# EAGLE board april1 board (EAGLE 7.5.0)
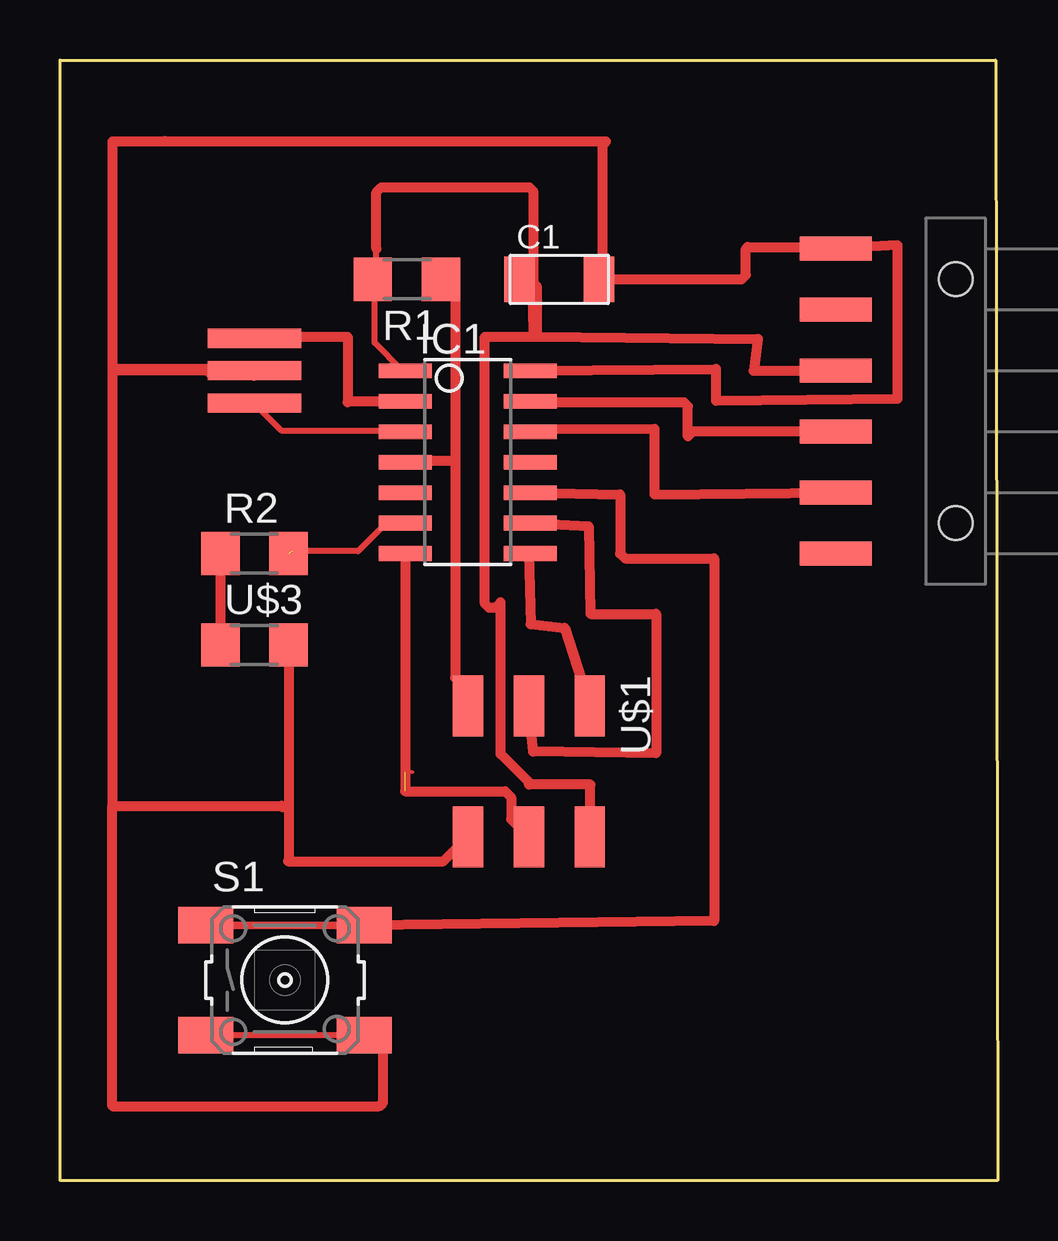
[diagram p0: board, top side]

Size 39.07 x 46.71 mm. Coordinates in mm from the lower left corner, seen from the top.
Outline: 0,46.71 38.99,46.71 39.07,0 0,0 0,46.71
Copper layers (1*16): Top 0.035mm / dielectric 1.5mm / Bottom 0.035mm
Design rules "default": minimum track width 10mil, minimum drill 24mil, track to track 8mil, track to pad 8mil, pad to pad 8mil, via to via 8mil, smd to smd 8mil, copper to edge 40mil, drill to drill 8mil, minimum pad ring 10mil, minimum via ring 8mil, stop-mask expansion 4mil, vias tented up to drill 0mil, thermal gap 10mil

## Footprints (pad centres in the part's own frame; a part is rotated, then mirrored left to right if it is on the bottom)
C1206FAB = smd 1.27 x 1.905: 1 -1.651,0; 2 1.651,0
SOIC14 = smd 0.61 x 2.21: 1 -3.81,-2.603; 2 -2.54,-2.603; 3 -1.27,-2.603; 4 0,-2.603; 5 1.27,-2.603; 6 2.54,-2.603; 7 3.81,-2.603; 8 3.81,2.603; 9 2.54,2.603; 10 1.27,2.603; 11 0,2.603; 12 -1.27,2.603; 13 -2.54,2.603; 14 -3.81,2.603
1X06-SMD = smd 1 x 3: 1 -6.35,5; 2 -3.81,5; 3 -1.27,5; 4 1.27,5; 5 3.81,5; 6 6.35,5 | hole 1.4: -5.08,0; 5.08,0
R1206 = smd 1.6 x 1.803: 1 -1.422,0; 2 1.422,0
6MM_SWITCH = smd 2.286 x 1.524: 1 -3.302,2.286; 2 3.302,2.286; 3 -3.302,-2.286; 4 3.302,-2.286
2X03SMD = smd 2.54 x 1.27: 1 -2.54,2.54; 2 2.92,2.54; 3 -2.54,0; 4 2.92,0; 5 -2.54,-2.54; 6 2.92,-2.54
EFOBM = smd 0.8 x 3.9: 1 -1.35,0; 2 0,0; 3 1.35,0
LED1206 = smd 1.6 x 1.803: 1 -1.422,0; 2 1.422,0

## Placement (x,y rotation side)
C1  1UF  [C1206FAB]  20.8,37.57 0 top
IC1  ATTINY44-SSU  [SOIC14]  16.99,29.95 270 top
JP1  [1X06-SMD]  37.31,32.49 90 top
R1  10k  [R1206]  14.45,37.57 180 top
R2  499  [R1206]  8.1,26.14 0 top
S1  [6MM_SWITCH]  9.37,8.36 0 top
U$1  AVRISPSMD  [2X03SMD]  19.53,17.25 270 top
U$2  RESONATOR  [EFOBM]  8.1,33.76 270 top
U$3  LED  [LED1206]  8.1,22.33 0 top

## Library data of the parts
C1 IC1 R1 R2 S1 U$1-U$3 = fab
JP1 = SparkFun

## Nets
BUTTON: IC1.10 S1.1 S1.2
CTS: JP1.5
GND: C1.2 IC1.14 JP1.6 S1.3 S1.4 U$1.6 U$2.2 U$3.2
LED: IC1.6 R2.2
MISO: IC1.8 U$1.1
MOSI: IC1.7 U$1.4
N$2: IC1.2 U$2.1
N$3: R2.1 U$3.1
N$4: IC1.3 U$2.3
RST: IC1.4 R1.1 U$1.5
RTS: JP1.1
RX: IC1.12 JP1.2
SCK: IC1.9 U$1.3
TX: IC1.13 JP1.3
VCC: C1.1 IC1.1 JP1.4 R1.2 U$1.2

## Tracks (layer width: path | path; a pad name or v marks a point on that pad's centre or on a via)
BUTTON
  Top 0.127: 6.07,10.9 S1.1
  Top 0.305: S1.1 S1.2
  Top 0.406: IC1.10 23.34,28.6 23.34,26.14 23.55,25.93 27.25,25.93 27.25,10.82 S1.2
GND
  Top 0.127: 22.48,37.67 22.48,37.74 | IC1.14 19.6,33.68 | 22.61,37.57 C1.2 | 4.29,43.33 4.37,43.33 4.37,43.43 | 13.31,6.07 13.18,6.07 | 6.25,33.55 6.25,33.65 8.76,33.65 | 9.52,15.67 9.27,15.67 9.27,15.57 | U$1.6 16.99,14.07 | 9.45,22.33 U$3.2
  Top 0.254: 22.48,37.67 C1.2 | 16.99,14.35 U$1.6 16.99,14.12 | S1.3 S1.4 | 6.25,33.55 8.08,33.55 U$2.2 6.25,33.55
  Top 0.305: S1.4 13.18,6.07
  Top 0.406: 22.61,37.57 22.61,43.15 22.76,43.31 4.39,43.31 | 4.39,43.31 4.37,43.33 | 13.18,6.07 13.46,5.79 13.46,3.25 13.31,3.1 2.18,3.1 2.18,15.65 | 9.27,15.57 9.22,15.62 2.21,15.62 2.18,15.65 | U$3.2 9.52,15.67 9.52,13.33 9.5,13.31 15.98,13.31 U$1.6 | C1.2 28.4,37.57 28.57,37.74 28.57,38.84 28.65,38.91 32.24,38.91 JP1.6 34.9,38.99 34.9,32.59 27.33,32.51 27.33,33.83 IC1.14 | 4.39,43.31 2.18,43.31 2.18,33.83 6.07,33.83 6.25,33.65 | 8.08,33.55 7.87,33.76 2.26,33.76 2.18,33.68 2.18,15.65
LED  (1 unrouted)
  Top 0.254: 9.68,26.24 12.42,26.24 13.56,27.38 14.25,27.38 IC1.6
MISO
  Top 0.127: 22.05,19.79 U$1.1
  Top 0.254: IC1.8 19.53,26.14
  Top 0.406: 19.53,26.14 19.61,23.19 21.03,23.04 U$1.1
MOSI  (1 unrouted)
  Top 0.127: 14.45,17.04 14.7,17.03 14.39,17.03
  Top 0.254: 19.51,14.35 U$1.4
  Top 0.406: IC1.7 14.39,16.24 14.38,16.23 18.54,16.23 18.8,15.98 18.8,15.06 U$1.4
N$2
  Top 0.127: U$2.1 8.1,35.08
  Top 0.254: 14.25,32.64 IC1.2
  Top 0.406: U$2.1 8.17,35.18 11.99,35.18 11.99,32.44 12.04,32.49 IC1.2
N$3
  Top 0.406: R2.1 U$3.1
N$4
  Top 0.254: IC1.3 14.25,31.27 9.22,31.27 8.31,32.18 U$2.3
RST
  Top 0.406: R1.1 16.46,36.98 16.46,30.02 | 16.46,30.02 16.46,20.95 16.99,20.42 U$1.5 | IC1.4 14.47,30.02 16.46,30.02
RX
  Top 0.127: IC1.12 19.6,31.32
  Top 0.406: 19.6,31.32 24.76,31.34 24.76,28.6 JP1.2
SCK
  Top 0.127: 19.6,27.53 IC1.9
  Top 0.406: IC1.9 22.02,27.28 22.1,23.62 24.84,23.62 24.84,17.81 19.71,17.88 U$1.3
TX
  Top 0.127: 19.74,32.41 19.74,32.44
  Top 0.254: 19.74,32.41 IC1.13
  Top 0.406: JP1.3 26.37,31.22 26.16,31.01 26.16,32.28 26.01,32.44 19.65,32.44 IC1.13
VCC
  Top 0.127: C1.1 19.58,37.57 19.58,36.83
  Top 0.254: IC1.1 14.25,33.78 13.11,34.92 13.11,37.44 R1.2 13.11,37.67 13.18,37.67 13.18,38.84 | 19.05,37.67 C1.1
  Top 0.406: 13.18,38.84 13.18,41.2 13.39,41.4 19.56,41.4 19.71,41.25 19.71,36.96 19.58,36.83 | 19.68,37.59 19.71,35.18 | 19.71,35.18 19.86,35.18 | 19.86,35.18 29.08,35.08 28.91,33.76 JP1.4 | 19.58,37.57 19.86,37.29 19.86,35.18 | U$1.2 22.02,14.38 22.2,14.56 22.1,14.56 22.1,16.51 19.53,16.51 19.53,16.61 18.36,17.78 18.36,24.1 18.14,23.88 17.88,23.88 17.7,24.05 17.7,35.18 19.71,35.18